# Altium PCB pcb-main.PcbDoc
Units mil, origin at the board's own origin, x right, y up, seen from the top; angles counter-clockwise.
Board outline 1181.1 x 1181.1 mil, 2 copper layers (Top Layer, Bottom Layer); 23 components, 15 nets, 51 pads, 8 vias.
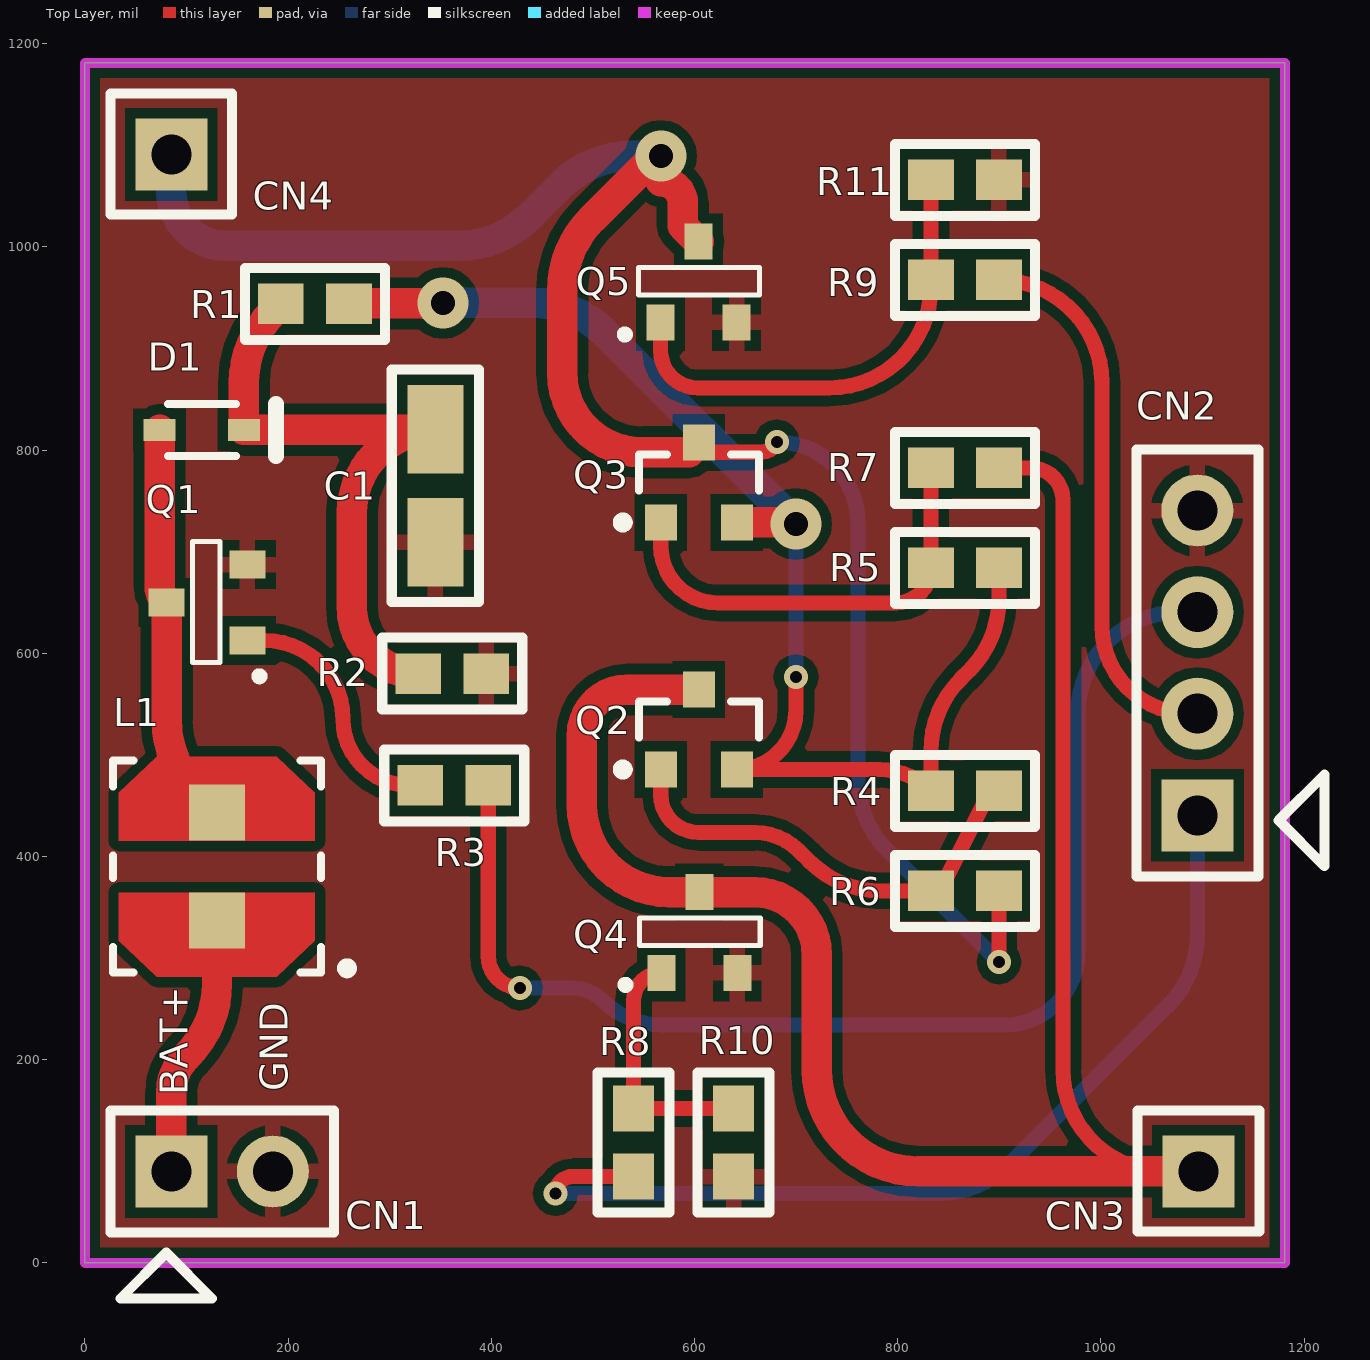
[diagram p0: Top Layer view]
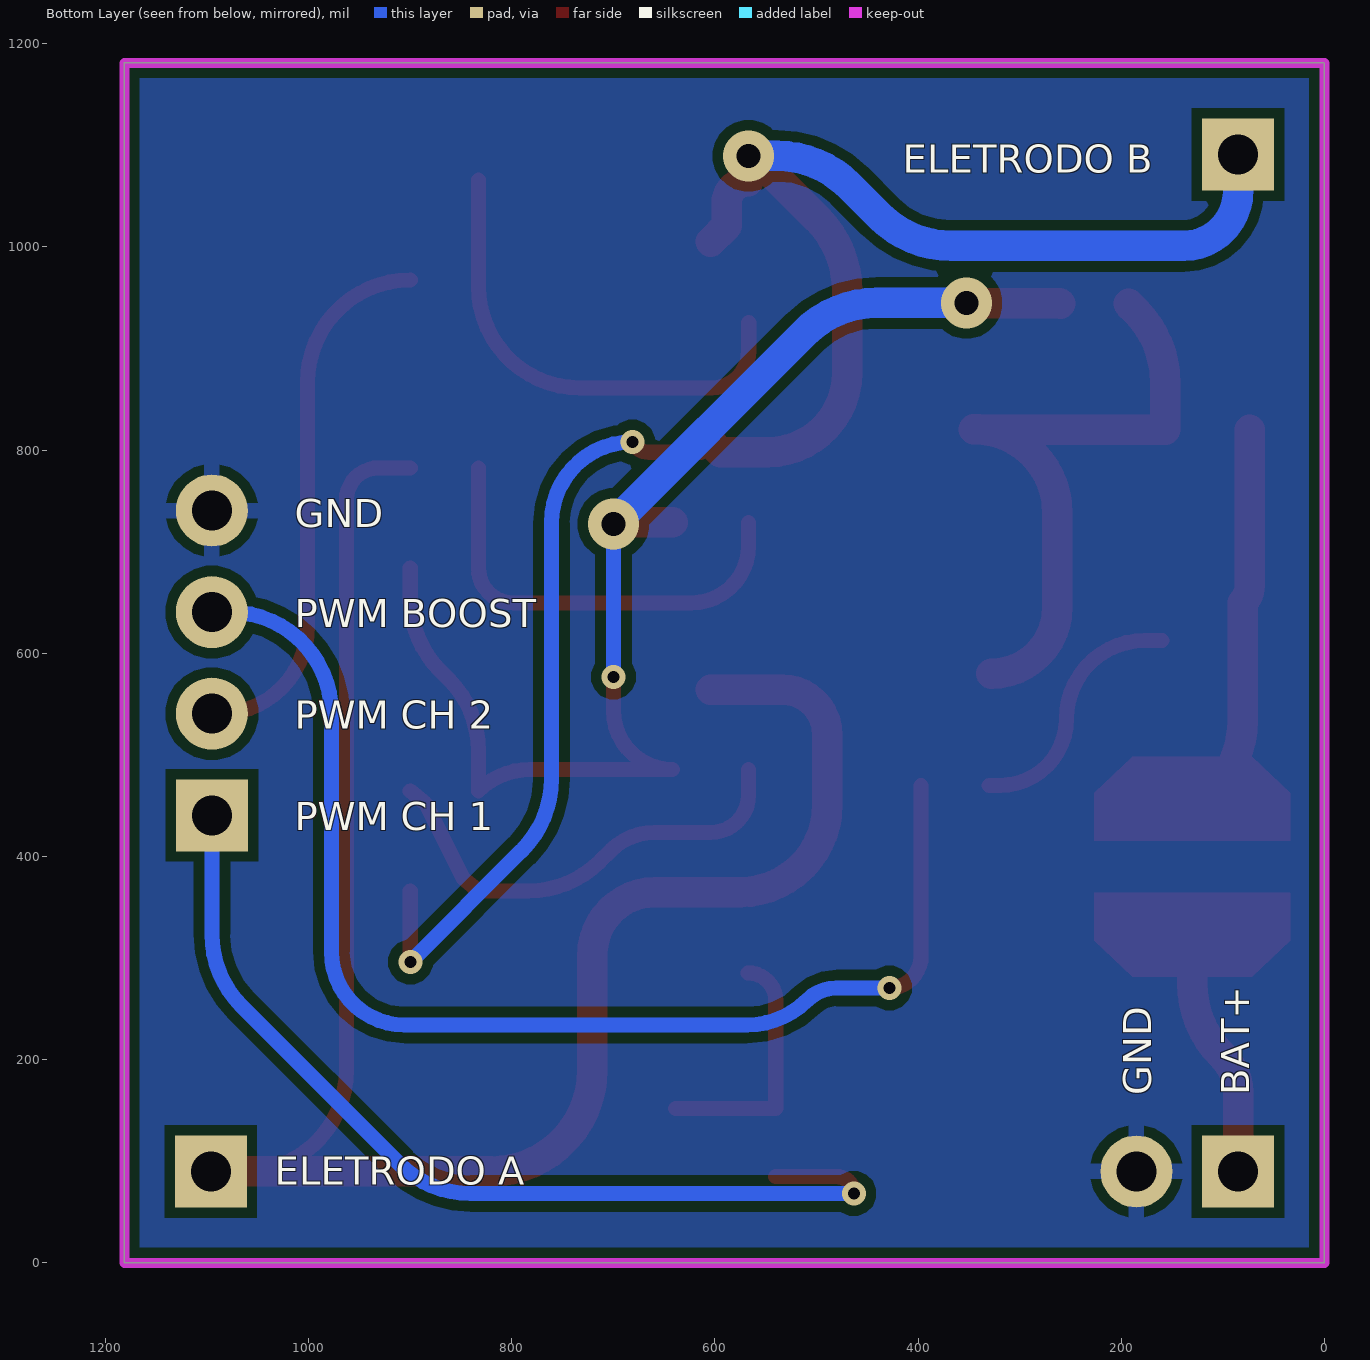
[diagram p1: Bottom Layer view, seen from below]
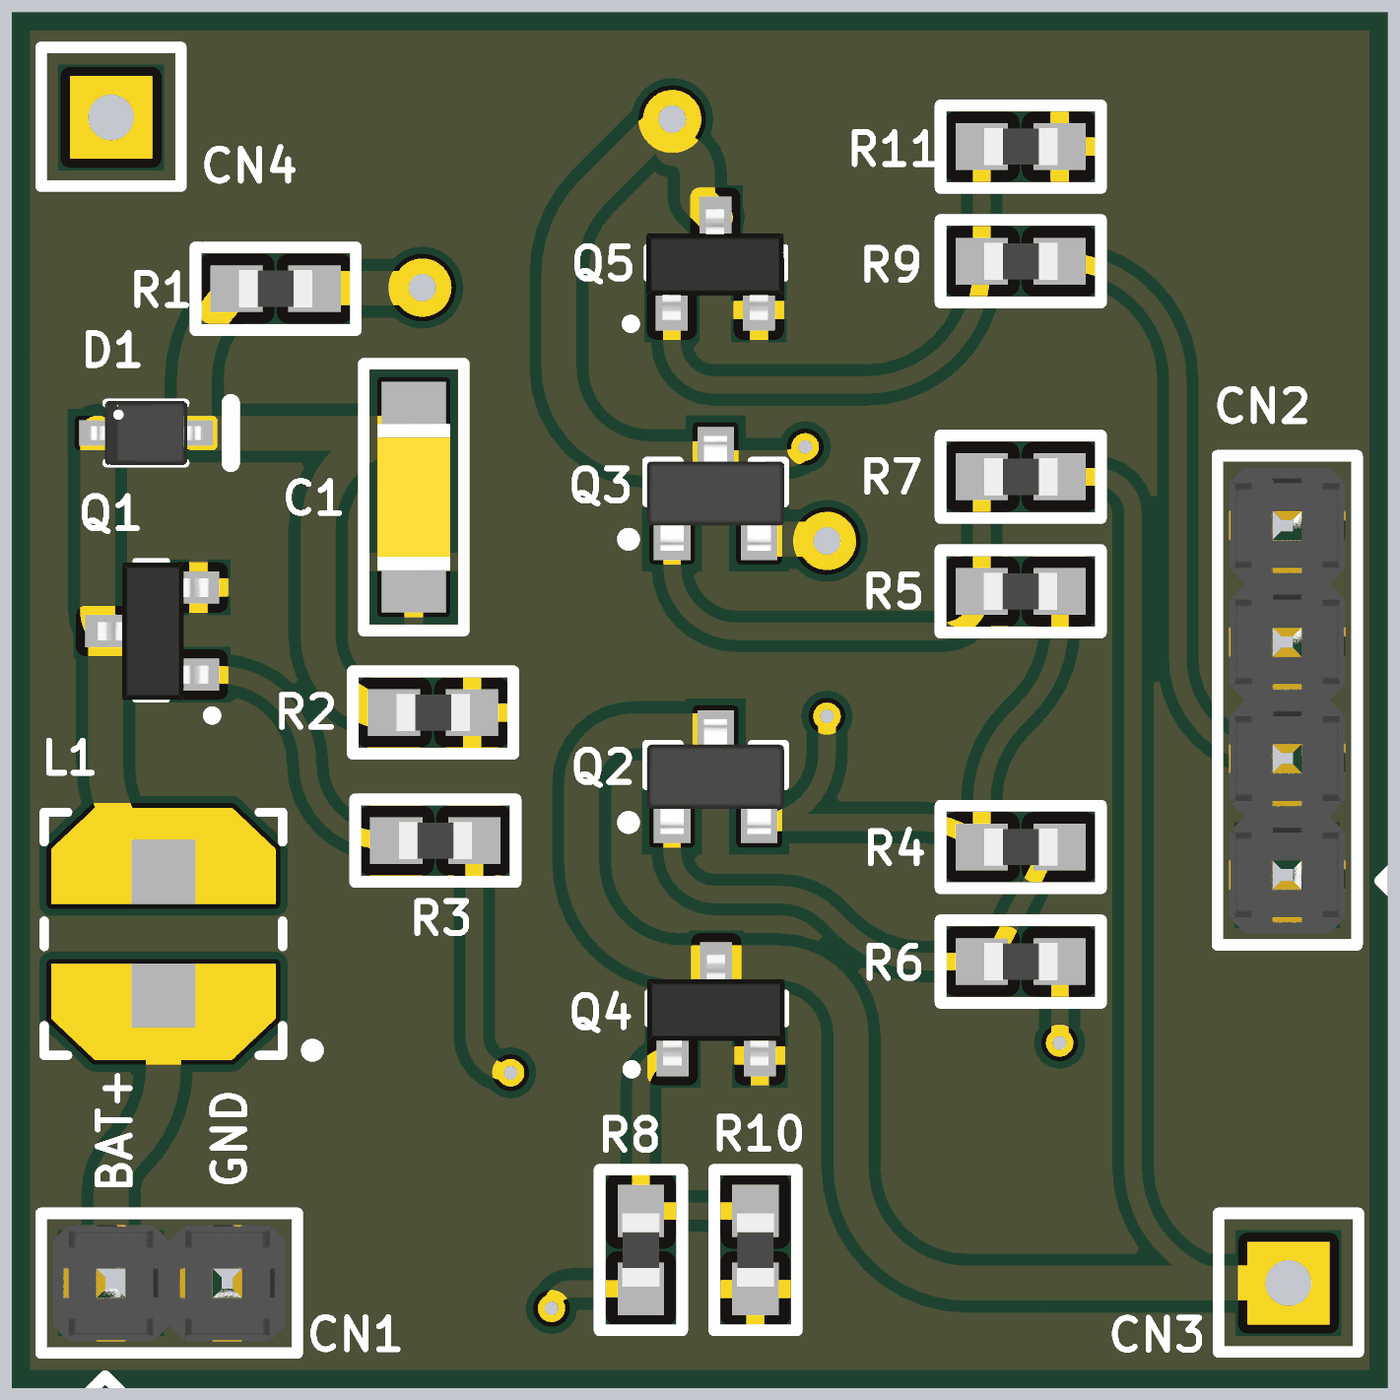
[diagram p2: 3D render of the assembled board from above, using the file's embedded part models]

## Layer stack, top to bottom
Top Solder: solder mask 0.4, Solder Resist, Dk 3.5
Top Layer: signal copper 1.4
Dielectric 1: dielectric 12.6, FR-4, Dk 4.8
Bottom Layer: signal copper 1.4
Bottom Solder: solder mask 0.4, Solder Resist, Dk 3.5

## Board outline
0,0 0,1181.1 1181.1,1181.1 1181.1,0

## Design rules (kind name [scope] priority, off if disabled: settings)
Clearance [All] p1: gap=10 ignorepadtopadclearanceinfootprint=FALSE except(0: Arc-Hole Track-Hole SMDPad-Hole THPad-Hole Via-Hole Fill-Hole Poly-Hole Region-Hole Text-Hole)
PlaneConnect [All] p1: planeconnectstyle=Relief reliefexpansion=20 reliefentries=4 reliefconductorwidth=15.75 reliefairgap=10
PolygonConnect [All] p1: connectstyle=Relief reliefconductorwidth=15.75 reliefentries=4 polygonreliefangle="90 Angle" airgapwidth=10
RoutingVias [All] p1: holewidth=28 width=50 viastyle="Through Hole" minholewidth=28 minwidth=50 maxholewidth=28 maxwidth=50
SolderMaskExpansion [All] p1: expansion=4 istentingtop=FALSE
Width [All] p1: maxlimit=30 minlimit=15 preferedwidth=20
29 further rules are at their usual default settings.

## Classes and differential pairs
component class main: C1 CN1 CN4 D1 L1 Q1 Q2 Q3 Q4 Q5 R1 R2 R3 R4 R5 R6 R7 R8 R9 R10 R11

## Components (designator, comment, footprint, x,y, rotation, side; value= is the part's Value field where it differs from the comment)
C1 "CAP CER 1206" "CAP CER 1206" 345,765 r90 top
CN1 "HEADER 2POS" HEADER-MACHO-2POS 85,90 r90 top
CN2 "HEADER 4POS" HEADER-MACHO-4POS 1095,440.55 r180 top
CN3 "HEADER 1POS" HEADER-MACHO-1POS 1096.1,90 r0 top
CN4 "HEADER 1POS" HEADER-MACHO-1POS 85,1091.1 r0 top
D1 "1N4148WS-7-F" DIOD-SOD323-2-A_V 115,820 r0 top
L1 "VLCF5028T-2R7N1R8-2" TDK-VLCF5028-2_V 130,390 r180 top value=2.7µH
Q1 "MMBT5551" "SOT-23 / Proto" 160,650 r90 top
Q2 "MMBT5401" DIOD-SOT23-3_V 604.19,525 r90 top
Q3 "MMBT5401" DIOD-SOT23-3_V 604.19,768.15 r90 top
Q4 "MMBT5551" "SOT-23 / Proto" 604.68,285.47 r0 top
Q5 "MMBT5551" "SOT-23 / Proto" 603.98,925.63 r0 top
R1 "RES SMD" "SMD 0603" 259.84,943.9 r180 top
R2 "RES SMD" "SMD 0603" 395,580 r180 top
R3 "RES SMD" "SMD 0603" 397.01,470 r180 top
R4 "RES SMD" "SMD 0603" 899.69,464.57 r180 top
R5 "RES SMD" "SMD 0603" 832.68,684.06 r0 top
R6 "RES SMD" "SMD 0603" 899.69,366.14 r180 top
R7 "RES SMD" "SMD 0603" 899.69,782.48 r180 top
R8 "RES SMD" "SMD 0603" 540,85 r90 top
R9 "RES SMD" "SMD 0603" 899.69,967.52 r180 top
R10 "RES SMD" "SMD 0603" 638.43,85 r90 top
R11 "RES SMD" "SMD 0603" 899.69,1065.94 r180 top

## Footprints (in the part's own frame and the unit in brackets; to place one, negate y for a bottom-side part, rotate by r counter-clockwise, add the part's x,y. Pads: shape width x height; smd on the part's side, far side on the other; paste and mask are expansions set on the pad)
"CAP CER 1206" [mil]
  rect 87x55 smd: 1(-55.5,0) 2(55.5,0)
  silkscreen extent -114,-43 114,43, body extent -63,-31 63,31, height 39
DIOD-SOD323-2-A_V [mm] "SOD-323, 2-Leads, Body 1.7x1.3mm, Lead Span 2.5mm"
  rect 0.8x0.55 smd: 1(-1.055,0) 2(1.055,0)
  silkscreen extent -0.85,-0.65 1.85,0.65, body extent -1.24,-0.7 1.24,0.7, height 1.2
DIOD-SOT23-3_V [mm] "SOT23, 3-Leads, Body 3x1.4mm, Pitch 0.95mm"
  rect 0.9x0.8 smd: 1(-1,0.95) 2(-1,-0.95) 3(1,0)
  silkscreen extent -1.12,-1.5 0.7,2.02, body extent -1.25,-1.5 1.25,1.5, height 1.1
HEADER-MACHO-1POS [mm] "Conector header macho 1 vias"
  rect 1.8x1.8 hole 1 mask+0.2: 1(0,0)
  silkscreen extent -1.52,-1.5 1.52,1.52
HEADER-MACHO-2POS [mm] "Conector header macho 2 vias"
  rect 1.8x1.8 hole 1 mask+0.2: 1(0,0)
  round 1.8 hole 1 mask+0.2: 2(0,-2.54)
  silkscreen extent -3.17,-4.06 1.52,1.52, body extent -1.27,-3.81 1.27,1.27, height 9.5
HEADER-MACHO-4POS [mm] "Conector header macho 4 vias"
  rect 1.8x1.8 hole 1 mask+0.2: 1(0,0)
  round 1.8 hole 1 mask+0.2: 2(0,-2.54) 3(0,-5.08) 4(0,-7.62)
  silkscreen extent -3.17,-9.14 1.52,1.52, body extent -1.27,-8.89 1.27,1.27, height 9.5
"SMD 0603" [mil] "*"
  rect 45x40 smd paste+0 mask+10.08: 1(0,0) 2(67.01,0)
  silkscreen extent -35,-35 102,35, body extent 2,-16 65,16, height 28
"SOT-23 / Proto" [mm] "Adaptado para proto"
  rect 0.7x0.9 smd mask+0.2: 1(-0.95,0) 2(0.95,0) 3(0,2.02)
  silkscreen extent -1.94,-0.4 1.52,1.37, body extent -1.51,-0.23 1.5,2.22, height 1
TDK-VLCF5028-2_V [mm] "SMD, 2-Leads, Body 5.2x5.3mm"
  rect 1.4x1.4 smd: 1(0,1.35) 2(0,-1.35)
  Top Layer region: -2.45,0.65 -2.45,1.85 -1.5,2.75 1.5,2.75 2.45,1.85 2.45,0.65
  Top Layer region: -2.45,-0.65 2.45,-0.65 2.45,-1.85 1.5,-2.75 -1.5,-2.75 -2.45,-1.85
  silkscreen extent -3.38,-2.65 2.6,2.66, body extent -2.6,-2.65 2.6,2.65, height 2.8

## Part data
C1: "CAPACITOR DE CERAMICA 1206 SMD", ComponentLink1Description="New link", Item="CAP CER 1206", Valor=(valor)
CN1: library part HEADER-MACHO-2POS, "Conector barra de pinos Furo passante, 2 posições (2,54mm)", Part Number=61300211121, ComponentLink1Description="HEADER MACHO 2POS", ComponentLink1URL=https://www.digikey.com/en/products/detail/w%C3%BCrth-elektronik/61300211121/4846823, Endereço Gaveteiro=***, Item="HEADER MACHO 2POS"
CN2: library part HEADER-MACHO-4POS, "Conector barra de pinos Furo passante, 4 posições (2,54mm)", Part Number=61300411121, ComponentLink1Description="HEADER MACHO 4POS", ComponentLink1URL=https://www.digikey.com/en/products/detail/w%C3%BCrth-elektronik/61300411121/4846827, Endereço Gaveteiro=***, Item="HEADER MACHO 4POS"
CN3 CN4: library part HEADER-MACHO-1POS, "Conector barra de pinos Furo passante, 1 posições", Part Number=61300211121, ComponentLink1Description="HEADER MACHO 2POS", ComponentLink1URL=https://www.digikey.com/en/products/detail/w%C3%BCrth-elektronik/61300211121/4846823, Endereço Gaveteiro=***, Item="HEADER MACHO 2POS"
D1: library part CMP-004-00002-2, "Fast Switching Diode, 75 V, 0.3 A, -65 to 150 degC, 2-Pin SOD323, RoHS, Tape and Reel", Case/Package=SOD, Forward Current=300mA, Forward Voltage=1.25V, Manufacturer="Diodes Inc", Max Operating Temperature=150°C, Max Surge Current=2A, Min Operating Temperature=-65°C, Package Description="2-Pin Small Outline Diode, Body 1.7 x 1.3 mm", Package Quantity=3000, Package Reference=SOD323-2, Peak Reverse Current=1uA, Datasheet URL=http://www.diodes.com/datasheets/ds30097.pdf, Datasheet Version="Rev. 25-2, 03/2016", Elements=1, Manufacturer URL=http://www.diodes.com/, Mounting Technology=SM, Packaging=TapeandReel, Pins=2, Recovery Time=4ns, RoHS Compliant=True
L1: library part CMP-006-00017-6, "Inductor for Power Circuits, 2.7 uH, +/- 30%,100 KHz, 1.82 A, -40 to 105 degC, 2-Pin SMD, RoHS, Reel", Case/Package=5028, Current Rating=1.82A, Inductance Tolerance=30%, Manufacturer=TDK, Max Operating Temperature=105°C, Min Operating Temperature=-40°C, Package Description="2-Pin Surface Mount Device, Body 5.2 x 5.3 mm", Package Quantity=500, Package Reference=VLCF5028-2, Resistance=0.033Ohm, Core Material=Ferrite, Datasheet URL=https://product.tdk.com/info/en/catalog/datasheets/inductor_commercial_power_vlcf5028-2_en.pdf, Datasheet Version=Apr-16, Mounting Technology=SM, Packaging=TapeandReel, RoHS Compliant=True, Saturation Current=1.82A, Shielding=Shielded, Tolerance=30%
Q1 Q4 Q5: library part BC847BLT1G, "Transistor NPN 45V 0.1A", Part Number=BC847, ComponentLink1Description=BC847, ComponentLink1URL=digikey.com/en/products/detail/onsemi/BC847BLT1G/918344, Endereço Gaveteiro=***, Item="Transistor NPN 45V 0.1A BC847"
Q2 Q3: library part CMP-00002-1, "Small Signal Bipolar Transistor, 0.5A I(C), 300V V(BR)CEO, 1-Element, PNP, Silicon", Collector-emitter Voltage-Max=300V, DC Current Gain-Min (hFE)=25, Frequency=50MHz, Max Collector Current=500mA, Max Operating Temperature=150°C, Package Body Material=Plastic, Package Shape=Rectangular, Package Style="SMALL OUTLINEMeter", Peak Reflow Temperature (Cel)=260°C, Power Dissipation-Max (Abs)=300mW, Time @ Peak Reflow Temperature-Max (s)=40s, Additional Feature="HIGH RELIABILITY", JESD-30 Code=R-PDSO-G3, JESD-609 Code=e3, Moisture Sensitivity Level=1, Number of Elements=1, Pins=3, Polarity/Channel Type=PNP, Qualification Status="Not Qualified", Reach SVHC Compliant=Yes, RoHS Compliant=Yes, Surface Mount=Yes, Terminal Finish=Tin, Terminal Form="Gull Wing", Terminal Position=DUAL, Transistor Application=SWITCHING, Transistor Element Material=SILICON
R1: ComponentLink1Description=Link, Item="RES SMD", Valor=100R
R2: ComponentLink1Description=Link, Item="RES SMD", Valor=(Valor)
R3: ComponentLink1Description=Link, Item="RES SMD", Valor=1K
R4 R5 R10 R11: ComponentLink1Description=Link, Item="RES SMD", Valor=47K
R6 R7 R8 R9: ComponentLink1Description=Link, Item="RES SMD", Valor=2K

## Via types
v1: diameter 23.62, hole 11.81, Top Layer to Bottom Layer, 5 vias
v2: diameter 50, hole 23.62, Top Layer to Bottom Layer, 3 vias

## Nets (pads, with @x,y where several pads share a name; then routed paths per layer and width w, separated by ;. In a path a pad name is that pad's centre, name@x,y a point inside that pad or via, vN(x,y) a via of type N, cw(c..) or ccw(c..) an arc to the next point about the centre after c; other vN are vias at no path point)
BAT+: CN1.1 L1.1 | length 259.1
  Top Layer w30: CN1.1 85,167.97 cw(c134.2,167.97) 99.41,202.76 100.71,204.06 ccw(c30,274.77) 130,274.77 L1.1
GND: C1.1 CN1.2 CN2.4 Q1.2 Q4.2 Q5.2 R2.1 R10.1 R11.1
NetCN2_1: CN2.1 R8.1 | length 956.6
  Top Layer w15: v1(463.23,68.35) cw(c479.88,68.35) 479.88,85 R8.1
  Bottom Layer w15: v1(463.23,68.35) 840.55,68.35 ccw(c840.55,166.82) 910.18,97.19 1065.71,252.72 ccw(c995,323.43) 1095,323.43 CN2.1
NetCN2_2: CN2.2 R9.1 | length 541.6
  Top Layer w15: R9.1 cw(c899.69,866.22) 1000.98,866.22 1000.98,627.03 ccw(c1087.41,627.03) CN2.2@1094.97,540.93
NetCN2_3: CN2.3 R3.1 | length 1226.2
  Top Layer w15: R3.1 397.01,301.81 ccw(c428.15,301.81) v1(428.15,270.67)
  Bottom Layer w15: v1(428.15,270.67) 480.34,270.67 cw(c480.34,230.34) 508.86,258.86 ccw(c568.26,318.26) 568.26,234.25 905.51,234.25 ccw(c905.51,306.1) 977.36,306.1 977.36,540.55 cw(c1077.36,540.55) 1077.36,640.55 CN2.3
NetCN3_1: CN3.1 Q2.3 Q4.3 R7.1 | length 1869.8
  Top Layer w15: R7.1 931.1,782.48 cw(c931.1,750.98) 962.6,750.98 962.6,190 ccw(c1062.6,190) 1062.6,90 CN3.1
  Top Layer w30: Q2.3 533.86,564.37 ccw(c533.86,519.69) 489.17,519.69 489.17,450.79 ccw(c574.96,450.79) 574.96,365 Q4.3 658.62,365 cw(c658.62,303.15) 720.47,303.15 720.47,190 ccw(c820.47,190) 820.47,90 CN3.1@1062.6,90
NetCN4_1: CN4.1 Q3.3 Q5.3 R6.1 | length 1888.7
  Top Layer w15: Q3.3 613.79,797.92 664.26,797.92 ccw(c664.26,819.48) 679.51,804.23 681.01,807.84 v1(681.1,808.07) ; v1(899.61,296.26) 899.69,296.34 R6.1
  Top Layer w30: Q5.3 588.47,1020.67 588.47,1042.92 ccw(c566.93,1042.92) 566.93,1064.45 v2(566.93,1089.57) 561.02,1089.57 499.02,1027.56 ccw(c569.73,956.85) 469.73,956.85 469.73,876.22 ccw(c548.03,876.22) 548.03,797.92 594.58,797.92 Q3.3
  Bottom Layer w15: v1(681.1,808.07) cw(c681.1,728.35) 760.83,728.35 760.83,476.46 ccw(c860.83,476.46) 790.12,405.75 v1(899.61,296.26)
  Bottom Layer w30: CN4.1@90,1086.1 CN4.1 85,1054.76 ccw(c138.78,1054.76) 138.78,1000.98 367.04,1000.98 ccw(c367.04,1100.98) 437.75,1030.27 467.76,1060.28 cw(c538.47,989.57) 538.47,1089.57 v2(566.93,1089.57)
NetD1_1: D1.1 L1.2 Q1.3 | length 394.9
  Top Layer w30: D1.1 73.46,666.92 ccw(c97.39,666.92) Q1.3 80.47,534.1 ccw(c180.47,534.1) 109.76,463.39 L1.2
NetQ1_1: Q1.1 R3.2 | length 251.4
  Top Layer w15: Q1.1 176.77,612.6 cw(c176.77,535.43) 253.94,535.43 ccw(c319.37,535.43) 319.37,470 R3.2
NetQ2_1: Q2.1 R4.1 R6.2 | length 450.1
  Top Layer w15: Q2.1 566.79,460.85 ccw(c603.98,460.85) 603.98,423.66 659.63,423.66 cw(c659.63,363.17) 702.4,405.94 712.92,395.43 ccw(c783.63,466.14) 783.63,366.14 R6.2 847.68,378.64 884.69,452.07 R4.1
NetQ2_2: Q2.2 Q3.2 R1.1 R4.2 R5.2 | length 1295.1
  Top Layer w15: v1(699.8,576.77) 699.8,543.84 cw(c641.59,543.84) Q2.2 781.83,485.63 cw(c781.83,413.72) R4.2 832.68,503.85 cw(c932.68,503.85) 861.97,574.56 870.4,582.99 ccw(c799.69,653.7) 899.69,653.7 R5.2
  Top Layer w30: R1.1 260.33,944.39 351.87,944.39 v2(352.36,944.88) ; Q3.2 696.38,728.78 cw(c696.38,723.94) v2(699.8,727.36)
  Bottom Layer w15: v1(699.8,576.77) v2(699.8,727.36)
  Bottom Layer w30: v2(352.36,944.88) 440.86,944.88 cw(c440.86,844.88) 511.57,915.59 v2(699.8,727.36)
NetQ3_1: Q3.1 R5.1 R7.2 | length 439
  Top Layer w15: Q3.1 566.79,705.85 ccw(c623.03,705.85) 623.03,649.61 798.23,649.61 ccw(c798.23,684.06) R5.1 R7.2
NetQ4_1: Q4.1 R8.2 R10.2 | length 247.5
  Top Layer w15: Q4.1 ccw(c567.28,258.19) 540,258.19 R8.2 R10.2
NetQ5_1: Q5.1 R9.2 R11.2 | length 476.5
  Top Layer w15: Q5.1 566.57,897.99 ccw(c603.35,897.99) 603.35,861.22 732.68,861.22 ccw(c732.68,961.22) 832.68,961.22 R9.2 R11.2
VCC: C1.2 D1.2 R1.2 R2.2 | length 638.7
  Top Layer w30: R1.2 185.82,936.89 ccw(c256.54,866.18) 156.54,866.18 D1.2 C1.2@335.95,820 ; R2.2 cw(c327.99,645.2) 262.8,645.2 262.8,738.3 cw(c345,738.3) C1.2@335.95,820 ; C1.2 ccw(c345,738.3) C1.2@335.95,820

## Polygon pours and split planes (outlines as drawn)
GND on Top Layer "GND_L01_P000" (solid, pour order 0): 0,1181.1 1181.1,1181.1 1181.1,0 0,0
GND on Bottom Layer "GND_L02_P001" (solid, pour order 1): 0,1181.1 1181.1,1181.1 1181.1,0 0,0

## Keep-outs
Keep-Out Layer:
  the board outline again, w10

## Silkscreen, mask and mechanical layers (free items; w line width, h text height)
Top Overlay:
  text "GND" at 199.76,168.82 h27.56 r90
  text "BAT+" at 101.34,164.88 h27.56 r90
Bottom Overlay:
  text "ELETRODO B" at 415.28,1072.91 h27.56
  text "GND" at 1013.23,724.29 h27.56
  text "PWM BOOST" at 1013.23,625.87 h27.56
  text "PWM CH 2" at 1013.23,525.87 h27.56
  text "PWM CH 1" at 1013.23,425.87 h27.56
  text "BAT+" at 73.94,164.88 h27.56 r270
  text "GND" at 170.31,164.88 h27.56 r270
  text "ELETRODO A" at 1033.39,76.85 h27.56